# EAGLE board 184550 simple (EAGLE 5.10)
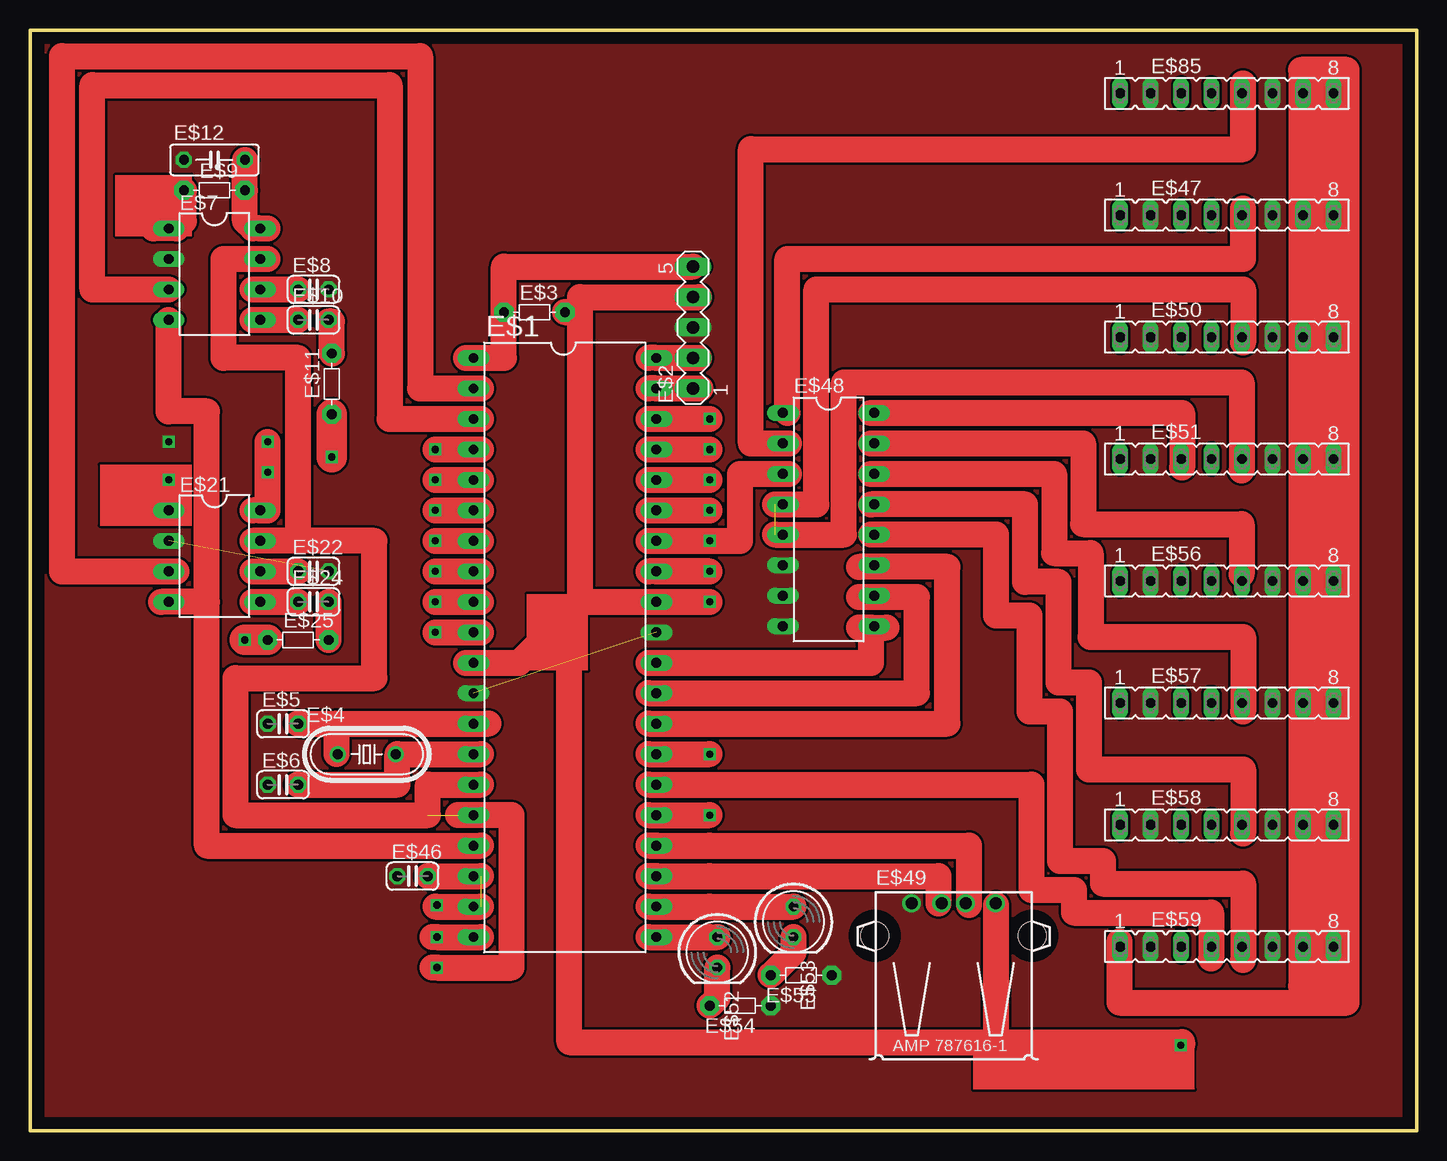
[diagram p0: board, top side]

Size 115.57 x 91.69 mm. Coordinates in mm from the lower left corner, seen from the top.
Outline: 115.57,0 115.57,91.69 0,91.69 0,0 115.57,0
Copper layers (1*16): Top 0.035mm / dielectric 1.5mm / Bottom 0.035mm
Design rules "default": minimum track width 10mil, minimum drill 24mil, track to track 8mil, track to pad 8mil, pad to pad 8mil, via to via 8mil, smd to smd 8mil, copper to edge 40mil, drill to drill 8mil, minimum pad ring 10mil, minimum via ring 8mil, stop-mask expansion 4mil, vias tented up to drill 0mil, thermal gap 10mil

## Footprints (pad centres in the part's own frame; a part is rotated, then mirrored left to right if it is on the bottom)
DIL40 = drill 0.813 long: 1 -24.13,-7.62; 2 -21.59,-7.62; 3 -19.05,-7.62; 4 -16.51,-7.62; 5 -13.97,-7.62; 6 -11.43,-7.62; 7 -8.89,-7.62; 8 -6.35,-7.62; 9 -3.81,-7.62; 10 -1.27,-7.62; 11 1.27,-7.62; 12 3.81,-7.62; 13 6.35,-7.62; 14 8.89,-7.62; 15 11.43,-7.62; 16 13.97,-7.62; 17 16.51,-7.62; 18 19.05,-7.62; 19 21.59,-7.62; 20 24.13,-7.62; 21 24.13,7.62; 22 21.59,7.62; 23 19.05,7.62; 24 16.51,7.62; 25 13.97,7.62; 26 11.43,7.62; 27 8.89,7.62; 28 6.35,7.62; 29 3.81,7.62; 30 1.27,7.62; 31 -1.27,7.62; 32 -3.81,7.62; 33 -6.35,7.62; 34 -8.89,7.62; 35 -11.43,7.62; 36 -13.97,7.62; 37 -16.51,7.62; 38 -19.05,7.62; 39 -21.59,7.62; 40 -24.13,7.62
MA05-1 = drill 1.016 long: 1 -5.08,0; 2 -2.54,0; 3 0,0; 4 2.54,0; 5 5.08,0
R-5 = drill 0.813 pad 1.6 octagon: 1 -2.54,0; 2 2.54,0
HC49/S = drill 0.813 round: 1 -2.413,0; 2 2.413,0
C025-024X044 = drill 0.813 octagon: 1 -1.27,0; 2 1.27,0
DIL08 = drill 0.813 long: 1 -3.81,-3.81; 2 -1.27,-3.81; 3 1.27,-3.81; 4 3.81,-3.81; 5 3.81,3.81; 6 1.27,3.81; 7 -1.27,3.81; 8 -3.81,3.81
C050-025X075 = drill 0.813 octagon: 1 -2.54,0; 2 2.54,0
FE08 = drill 0.813 long: 1 -8.89,0; 2 -6.35,0; 3 -3.81,0; 4 -1.27,0; 5 1.27,0; 6 3.81,0; 7 6.35,0; 8 8.89,0
DIL16 = drill 0.813 long: 1 -8.89,-3.81; 2 -6.35,-3.81; 3 -3.81,-3.81; 4 -1.27,-3.81; 5 1.27,-3.81; 6 3.81,-3.81; 7 6.35,-3.81; 8 8.89,-3.81; 9 8.89,3.81; 10 6.35,3.81; 11 3.81,3.81; 12 1.27,3.81; 13 -1.27,3.81; 14 -3.81,3.81; 15 -6.35,3.81; 16 -8.89,3.81
USB = drill 1 round: 1 -3.5,12.99; 2 -1,12.99; 3 1,12.99; 4 3.5,12.99 | hole 2.3: -6.57,10.28; 6.57,10.28
LED5MM = drill 0.813 octagon: A -1.27,0; K 1.27,0

## Placement (x,y rotation side)
E$1  [DIL40]  44.58,40.26 270 top
E$2  [MA05-1]  55.24,66.93 90 top
E$3  [R-5]  42.04,68.2 0 top
E$4  [HC49/S]  28.07,31.37 0 top
E$5  [C025-024X044]  21.08,33.91 0 top
E$6  [C025-024X044]  21.08,28.83 0 top
E$7  [DIL08]  15.37,71.37 270 top
E$8  [C025-024X044]  23.62,70.1 0 top
E$9  [R-5]  15.37,78.36 0 top
E$10  [C025-024X044]  23.62,67.56 0 top
E$11  [R-5]  25.15,62.23 90 top
E$12  [C050-025X075]  15.37,80.9 0 top
E$21  [DIL08]  15.37,47.88 270 top
E$22  [C025-024X044]  23.62,46.61 0 top
E$24  [C025-024X044]  23.62,44.07 0 top
E$25  [R-5]  22.35,40.89 0 top
E$46  [C025-024X044]  31.88,21.21 0 top
E$47  [FE08]  99.74,76.28 0 top
E$48  [DIL16]  66.55,50.93 270 top
E$49  [USB]  76.96,5.97 0 top
E$50  [FE08]  99.74,66.12 0 top
E$51  [FE08]  99.74,55.97 0 top
E$52  [LED5MM]  57.28,14.86 270 top
E$53  [LED5MM]  63.63,17.4 270 top
E$54  [R-5]  59.18,10.41 180 top
E$55  [R-5]  64.26,12.95 180 top
E$56  [FE08]  99.74,45.8 0 top
E$57  [FE08]  99.74,35.65 0 top
E$58  [FE08]  99.74,25.48 0 top
E$59  [FE08]  99.74,15.32 0 top
E$85  [FE08]  99.74,86.44 0 top

## Library data of the parts
E$1 = 74xx-eu
E$2 = con-lstb
E$3 E$9 E$11 E$25 E$54 E$55 = discrete
E$4 = crystal
E$5 E$6 E$8 E$10 E$12 E$22 E$24 E$46 = rcl
E$7 E$21 E$48 = 40xx
E$47 E$50 E$51 E$56-E$59 E$85 = con-lsta
E$49 = con-amp
E$52 E$53 = led

## Nets
GND: E$1.12 E$1.31 E$2.3 E$5.1 E$6.1 E$7.2 E$8.2 E$12.1 E$21.2 E$22.2 E$46.1 E$47.2 E$47.6 E$48.6 E$48.7 E$48.8 E$49.1 E$50.2 E$50.6 E$51.2 E$51.6 E$54.1 E$55.1 E$56.2 E$56.6 E$57.2 E$57.6 E$58.2 E$58.6 E$59.2 E$59.6 E$85.2 E$85.6
S$1: E$2.5
S$2: E$8.1
S$3: E$1.39
S$4: E$1.40
S$6: E$5.2
S$7: E$9.1
S$8: E$11.1
S$11: E$10.1
S$12: E$11.2
S$13: E$7.8 E$9.2
S$15: E$6.2
S$17: E$7.3
S$23: E$3.2
S$28: E$22.1
S$30: E$24.1
S$31: E$24.2 E$25.2
S$32: E$21.8
S$35: E$1.23
S$36: E$1.24
S$39: E$1.33
S$46: E$25.1
S$83: E$7.4
S$96: E$53.A
S$97: E$52.A
S$98: E$52.K E$54.2
S$99: E$53.K E$55.2

## Tracks (layer width: path | path; a pad name or v marks a point on that pad's centre or on a via)
GND  (via drill 0.6)  (2 unrouted)
  other vias: 11.56,57.4
  pour Top (no thermals): 0.76,-0.13 115.06,0.51 114.3,91.95 0,91.31
S$1
  Top 2.184: 36.32,64.39 39.5,64.39 39.5,72.01 E$2.5
S$2
  Top 2.184: 18.54,70.1 E$8.1
S$3
  Top 2.184: 55.88,61.85 E$1.39 51.56,61.85
S$4
  Top 2.184: 55.75,64.39 E$1.40 51.56,64.39
S$5  (via drill 0.6)
  Top 2.184: 51.56,26.29 v56.64,26.29
S$6
  Top 2.184: 25.53,33.91 38.23,33.91 | 25.53,33.91 25.53,31.37 | E$5.2 25.53,33.91
S$7
  Top 2.184: 10.29,75.18 12.19,75.18 12.83,75.82 E$9.1
S$8  (via drill 0.6)
  Top 2.54: v25.15,56.13 E$11.1
S$9  (via drill 0.6)
  Top 2.184: v33.78,56.77 37.59,56.77
S$10  (via drill 0.6)
  other vias: 19.81,54.86
S$11
  Top 2.184: 18.54,67.56 E$10.1
S$12
  Top 2.184: E$11.2 25.15,67.44 24.89,67.44
S$13
  Top 2.184: 19.81,75.18 E$7.8 18.54,75.18 17.91,75.82 E$9.2 17.91,80.9
S$14  (via drill 0.6)
  other vias: 19.81,57.4
S$15
  Top 2.184: E$6.2 30.61,28.83 30.61,31.37 37.59,31.37
S$16  (via drill 0.6)
  Top 2.184: v33.78,44.07 37.59,44.07
S$17
  Top 2.184: E$7.3 5.21,70.1 5.21,87.12 29.97,87.12 29.97,59.31 37.59,59.31
S$18
  Top 2.184: 12.19,46.61 2.67,46.61 2.67,89.53 32.51,89.53 32.51,61.85 37.59,61.85
S$19  (via drill 0.6)
  Top 2.184: v33.78,54.23 37.59,54.23
S$20  (via drill 0.6)
  Top 2.184: v33.78,49.15 37.59,49.15
S$21  (via drill 0.6)
  Top 2.184: v33.78,46.61 37.59,46.61
S$22  (via drill 0.6)  (1 unrouted)
  Top 2.184: 33.53,13.59 v33.91,13.59 40.13,13.59 40.13,26.29 35.69,26.29 | 37.59,28.83 33.15,28.83 33.15,26.29 17.14,26.29 17.14,37.72 28.7,37.72 28.7,49.15 22.35,49.15 | 19.81,72.64 16.13,72.64 16.13,64.39 22.35,64.39 22.35,49.15 | 22.35,49.15 18.54,49.15
S$23
  Top 2.184: E$3.2 45.21,68.2
S$24
  Top 2.184: 51.56,36.45 73.91,36.45 73.91,44.45 69.09,44.45
S$25
  Top 2.184: 51.56,33.91 76.45,33.91 76.45,46.99 69.09,46.99
S$26  (via drill 0.6)
  Top 2.184: 51.56,31.37 v56.64,31.37
S$27
  Top 2.184: 51.56,28.83 83.44,28.83 83.44,20.07 87,20.07 87,18.16 98.43,18.16 98.43,14.35
S$28
  Top 2.184: 18.54,46.61 E$22.1
S$29
  Top 2.184: 11.56,51.69 10.29,51.69 | 11.56,51.69 12.19,51.69 | 11.56,51.69 11.56,54.23
S$30
  Top 2.184: 18.54,44.07 E$24.1
S$31
  Top 2.184: E$25.2 E$24.2
S$32
  Top 2.184: 19.81,57.4 19.81,51.69 E$21.8 18.54,51.69
S$33
  Top 2.184: 51.56,16.13 56.64,16.13
S$34
  Top 2.184: 51.56,18.67 56.64,18.67
S$35
  Top 2.184: 51.56,21.21 E$1.23 56.64,21.21
S$36
  Top 2.184: 51.56,23.75 E$1.24 56.64,23.75
S$37  (via drill 0.6)
  Top 2.184: v33.78,41.53 37.59,41.53
S$38  (via drill 0.6)
  Top 2.184: 51.56,59.31 v56.64,59.31
S$39  (via drill 0.6)
  Top 2.184: 51.56,46.61 v56.64,46.61 E$1.33
S$40  (via drill 0.6)
  Top 2.184: 51.56,49.15 v56.64,49.15 59.18,49.15 59.18,54.74
S$41  (via drill 0.6)
  Top 2.184: 51.56,51.69 v56.64,51.69
S$42  (via drill 0.6)
  Top 2.184: 51.56,54.23 v56.64,54.23
S$43  (via drill 0.6)
  Top 2.184: 51.56,56.77 v56.64,56.77
S$44  (via drill 0.6)
  Top 2.184: 55.75,69.47 45.85,69.47 45.85,44.07 | 45.85,44.07 v56.64,44.07 | 45.85,44.07 40.77,38.99 36.32,38.99
S$45  (via drill 0.6)
  other vias: 11.56,54.23
S$46  (via drill 0.6)
  Top 2.54: E$25.1 v17.91,40.89
S$83
  Top 2.184: 37.59,23.75 14.73,23.75 14.73,44.07 | 14.73,44.07 10.92,44.07 | E$7.4 11.56,59.94 14.73,59.94 14.73,44.07
S$84  (via drill 0.6)
  Top 2.184: 37.59,16.13 v33.91,16.13 33.53,16.13
S$85  (1 unrouted)
  Top 2.184: 33.78,18.67 37.59,18.67 | 33.15,21.21 37.59,21.21
S$86
  Top 2.184: 78.23,18.8 78.23,23.75 51.56,23.75
S$87
  Top 2.184: 75.69,18.92 75.69,21.21 51.56,21.21
S$88
  Top 2.184: 101.09,34.92 101.09,41.15 88.39,41.15 88.39,48.13 85.34,48.13 85.34,54.74 70.1,54.74
S$89  (via drill 0.6)
  Top 2.184: v33.78,51.69 37.59,51.69
S$90
  Top 2.184: 70.1,41.91 69.09,41.91 | 70.1,41.91 70.1,38.99 51.56,38.99 | 70.1,41.91 71.37,41.91
S$91  (via drill 0.6)
  other vias: 33.91,18.8
S$92
  Top 1.143: 98.34,36.41 98.34,36.09
S$93
  Top 2.184: 59.18,54.74 63.25,54.74
S$94
  Top 2.184: 80.52,7.37 80.52,18.8 | 80.52,7.37 44.96,7.37 44.96,38.99 | 96.01,7.11 96.01,7.37 80.52,7.37
S$95
  Top 2.184: 90.81,15.75 90.81,10.67 109.73,10.67 109.73,88.39 105.92,88.39 105.92,12.06
S$96
  Top 2.184: 51.56,18.67 E$53.A
S$97
  Top 2.184: 51.56,16.13 E$52.A
S$98
  Top 2.184: E$52.K 57.28,11.05 E$54.2
S$99
  Top 2.184: E$53.K 63.63,14.86 E$55.2
S$100
  Top 2.184: 63.12,59.82 63.12,72.64 101.09,72.64 101.09,76.83
S$101
  Top 2.184: 45.85,44.07 56.64,44.07
S$102
  Top 2.184: 101.09,87.25 101.09,81.79 60.07,81.79 60.07,57.28 63.25,57.28
S$103  (1 unrouted)
  Top 2.184: 62.1,52.2 65.53,52.2 65.53,70.1 101.09,70.1 101.09,65.66 | 62.1,49.66 67.82,49.66 67.82,62.36 100.97,62.36 100.97,54.99
S$104
  Top 2.184: 101.09,24.77 101.09,30.1 88.27,30.1 88.27,37.34 85.73,37.34 85.73,45.72 82.93,45.72 82.93,52.2 70.1,52.2
S$105
  Top 2.184: 100.97,46.35 100.97,50.55 87.76,50.55 87.76,57.28 70.1,57.28
S$106
  Top 2.184: 96.01,55.24 96.01,59.82 70.1,59.82
S$107  (via drill 0.6)
  other vias: 95.89,7.11
S$109
  Top 2.184: 101.09,14.22 101.09,20.57 89.41,20.57 89.41,22.48 85.85,22.48 85.85,34.92 83.31,34.92 83.31,42.93 80.52,42.93 80.52,49.66 70.1,49.66
S$170
  Top 1.143: 98.34,87.21 98.34,86.89
(copper drawn outside any net)
  shapes: Top area x11

## Text on the board
Unrouted: +12V | GND | 5V | SDI | GND | +12V | +12V | CKI | VDD | CLK | +12V | GND | 5V | SDI | GND | +12V | +12V | CKI | VSS | RSET | 1k | OUT | GND | STROBE | IN | +12V | 5V | SDI | GND | +12V | +12V | MCLR | PGD | GND | CKI | RA0 | PGC | RA1 | RB5 | Q4 | VDD | Q6 | Q2 | RA2 | RB4 | +12V | +12V | +12V | RA3 | RB3 | IN | Q1 | GND | 5V | SDI | GND | CKI | Q7 | Q0 | VDD | CLK | RA4 | RB2 | VSS | RSET | RA5 | RB1 | SCL | Q5 | Q3 | OUT | GND | RE0 | RB0 | INH | C1 | STROBE | +12V | +12V | VEE | C2 | GND | 5V | SDI | GND | +12V | IN | RE1 | VDD | CKI | C3 | RE2 | VSS | VSS | VDD | RD7 | 22pf | VSS | RD6 | 20mhz | +12V | GND | 5V | SDI | GND | +12V | +12V | OSC1 | RD5 | CKI | 22pf | OSC2 | RD4 | RC0 | RC7 | SDO | RC1 | RC6 | VBUS | green | +12V | GND | 5V | SDI | GND | +12V | +12V | RC2 | D+ | CKI | D+ | VUSB | D- | D- | white | RD0 | RD3 | GND | RD1 | RD2 | +12V | GND | 5V | SDI | GND | +12V | +12V | CKI